# Altium PCB Battery chargers.PcbDoc
Units mm, origin at the board's own origin, x right, y up, seen from the top; angles counter-clockwise.
Board outline 35 x 24 mm, 2 copper layers (Top Layer, Bottom Layer); 33 components, 19 nets, 97 pads, 8 vias.
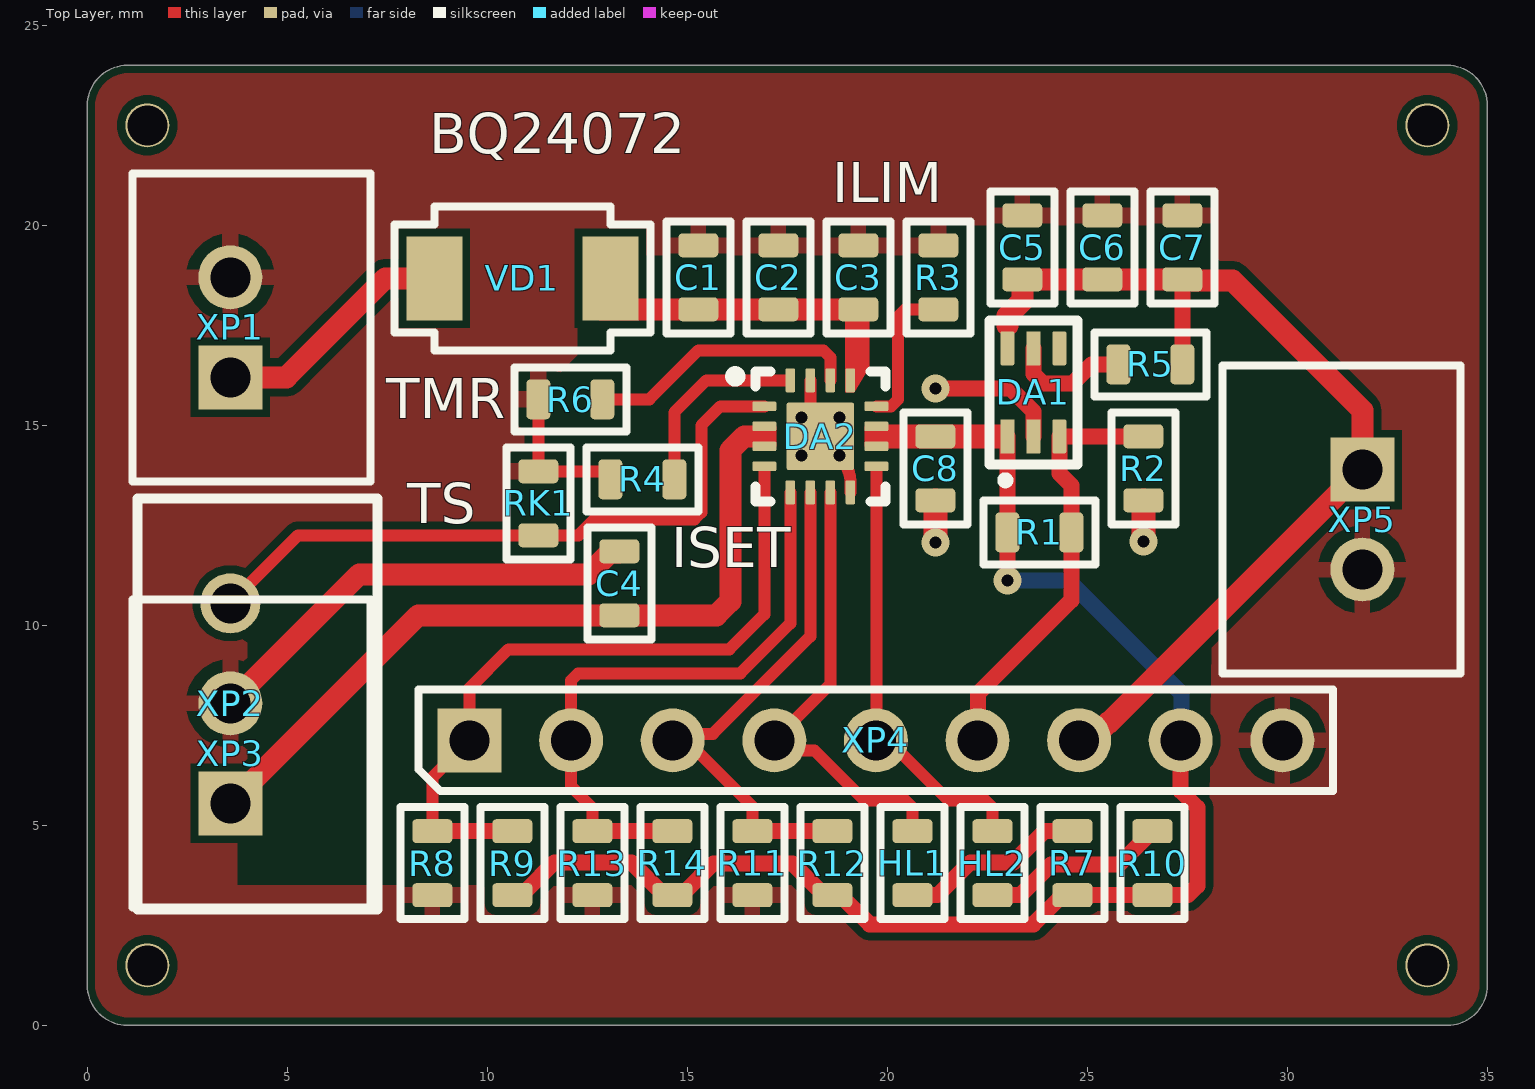
[diagram p0: Top Layer view]
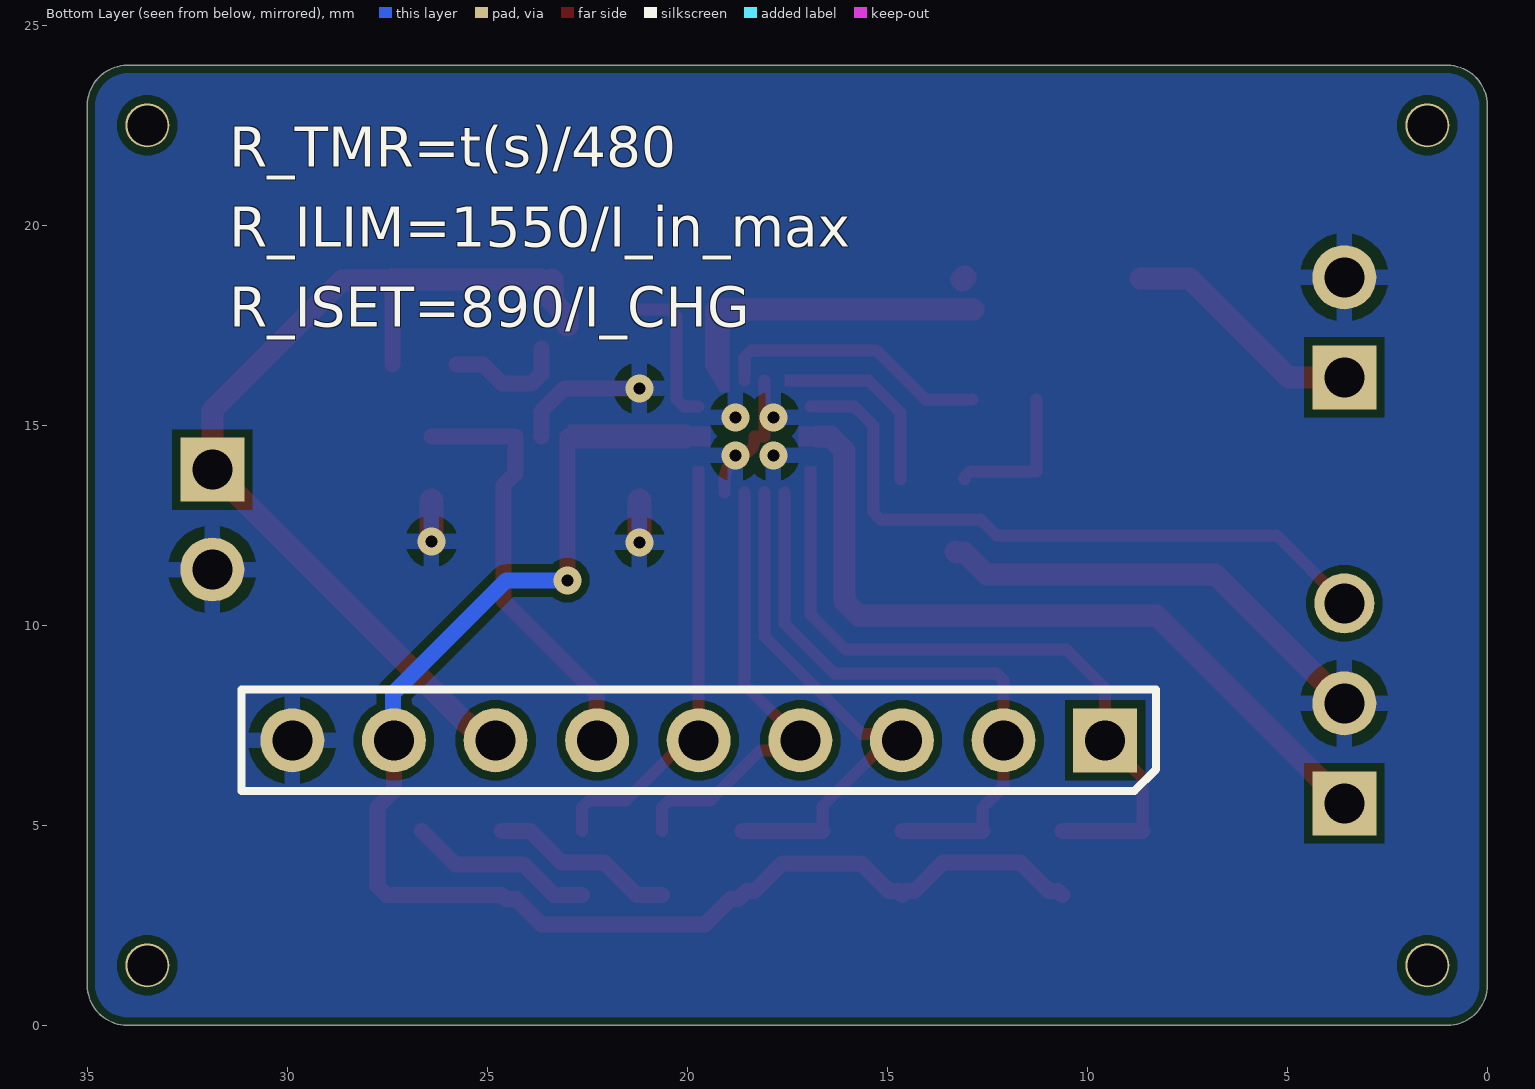
[diagram p1: Bottom Layer view, seen from below]

## Layer stack, top to bottom
Top Solder: solder mask 0.0102, Solder Resist, Dk 3.5
Top Layer: signal copper 0.0356
Dielectric 1: dielectric 0.32, FR-4, Dk 4.8
Bottom Layer: signal copper 0.0356
Bottom Solder: solder mask 0.0102, Solder Resist, Dk 3.5

## Board outline
0,1 0,23 cw(c1,23) 1,24 34,24 cw(c34,23) 35,23 35,1 cw(c34,1) 34,0 1,0 cw(c1,1)

## Design rules (kind name [scope] priority, off if disabled: settings)
AcuteAngle [All] p1: minimum=4.50000000000000E+0001 checktracksonly=FALSE
BoardOutlineClearance BoardOutlineClearance_mid [OnMid or OnPlane] p1: gap=0.5 ignorepadtopadclearanceinfootprint=FALSE
BoardOutlineClearance BoardOutlineClearance_top [OnCopper] p2: gap=0.2 ignorepadtopadclearanceinfootprint=FALSE
Clearance [All] p1: gap=0.15 ignorepadtopadclearanceinfootprint=FALSE except(0: Arc-Hole Track-Hole SMDPad-Hole THPad-Hole Via-Hole Fill-Hole Poly-Hole Region-Hole Text-Hole; 0.2: Arc-Poly Arc-Region Track-Poly Track-Region SMDPad-Poly SMDPad-Region THPad-Poly THPad-Region Via-Poly Via-Region Fill-Poly Fill-Region Poly-Poly Poly-Region Poly-Text Region-Region Region-Text)
ComponentClearance [All] p1: gap=0.2 collisioncheckmode=3 verticalgap=0.2 showdistances=FALSE
DiffPairsRouting [All] p1: maxlimit=0.3 minlimit=0.15 mostfreqgap=0.15 toplayer_minwidth=0.15 toplayer_maxwidth=0.3 toplayer_prefwidth=0.15 bottomlayer_minwidth=0.15 bottomlayer_maxwidth=0.3 bottomlayer_prefwidth=0.15 maxuncoupledlength=12.7
Height [All] p1: minheight=0 maxheight=50 prefheight=10
HoleSize HoleSize_pad [IsPad] p1: absolutevalues=TRUE maxlimit=6 minlimit=0.6 maxpercent=80.000 minpercent=20.000
HoleSize HoleSize_via [IsVia] p2: absolutevalues=TRUE maxlimit=1 minlimit=0.3 maxpercent=80.000 minpercent=20.000
HoleToHoleClearance [All] p1: gap=0.4 allowstackedmicrovias=TRUE
MinimumAnnularRing [All] p1: minimumring=0.2
PasteMaskExpansion [All] p1: expansion=-0.05
PlaneClearance [All] p1: clearance=0.4
PlaneConnect [All] p1: planeconnectstyle=Direct reliefexpansion=0.508 reliefentries=4 reliefconductorwidth=0.254 reliefairgap=0.254
PolygonConnect [All] p1: connectstyle=Relief reliefconductorwidth=0.4 reliefentries=4 polygonreliefangle="90 Angle" airgapwidth=0.3
RoutingCorners [All] p1: cornerstyle=45-Degree minsetback=2 maxsetback=2
RoutingVias [All] p1: holewidth=0.3 width=0.7 viastyle="Through Hole" minholewidth=0.3 minwidth=0.7 maxholewidth=1 maxwidth=1.5
SMDEntry [All] p1: side=TRUE corner=TRUE anyangle=FALSE
SilkToSilkClearance [All] p1: silktosilkclearance=0
SilkToSolderMaskClearance [IsPad] p1: minsilkscreentomaskgap=0 clearancetoexposedcopper=TRUE
SolderMaskExpansion [All] p1: expansion=0.075 istentingtop=FALSE
Width [All] p1: maxlimit=3 minlimit=0.15 preferedwidth=0.2
19 further rules are at their usual default settings.

## Components (designator, comment, footprint, x,y, rotation, side; value= is the part's Value field where it differs from the comment)
C1 "GRM188R61C106MA73" C_0603_Manual_mount 15.274,18.7 r90 top value="10 мк"
C2 "GRM188R61C225KE15" C_0603_Manual_mount 17.275,18.7 r90 top value="2,2 мк"
C3 "CC0603KRX7R7BB104" C_0603_Manual_mount 19.275,18.7 r90 top value="0,1 мк"
C4 "GRM188R61C106MA73" C_0603_Manual_mount 13.3,11.049 r90 top value="10 мк"
C5 "GRM188R61C106MA73" C_0603_Manual_mount 23.376,19.45 r90 top value="10 мк"
C6 "GRM188R61C225KE15" C_0603_Manual_mount 25.376,19.45 r90 top value="2,2 мк"
C7 "CC0603KRX7R7BB104" C_0603_Manual_mount 27.376,19.45 r90 top value="0,1 мк"
C8 "GRM188R61C106MA73" C_0603_Manual_mount 21.2,13.925 r270 top value="10 мк"
DA1 "TPS22919DCKT" SC70 23.65,15.825 r90 top
DA2 "BQ24072RGTR" VQFN-16 18.325,14.725 r0 top
HL1 "KP-1608MGC" LED_0603_Green_Manual_mount 20.627,4.055 r270 top
HL2 "KP-1608SURC" LED_0603_Red_Manual_mount 22.627,4.055 r270 top
R1 "RC0603JR-0710KL" R_0603_Manual_mount 23.801,12.325 r180 top value="10 к"
R2 "RC0603JR-0710KL" R_0603_Manual_mount 26.401,13.925 r90 top value="10 к"
R3 "RC0603JR-071K1L" R_0603_Manual_mount 21.275,18.7 r270 top value="1,1 к"
R4 "RC0603JR-07910RL" R_0603_Manual_mount 13.875,13.65 r0 top value=910
R5 "RC0603JR-071KL" R_0603_Manual_mount 26.575,16.525 r0 top value="1 к"
R6 "RC0603JR-0747KL" R_0603_Manual_mount 12.075,15.65 r0 top value="47 к"
R7 "RC0603JR-071K5L" R_0603_Manual_mount 24.627,4.055 r270 top value="1,5 к"
R8 "RC0603JR-0710KL" R_0603_Manual_mount 8.625,4.055 r90 top value="10 к"
R9 "RC0603JR-0710KL" R_0603_Manual_mount 10.626,4.055 r270 top value="10 к"
R10 "RC0603JR-071K5L" R_0603_Manual_mount 26.628,4.055 r270 top value="1,5 к"
R11 "RC0603JR-0710KL" R_0603_Manual_mount 16.626,4.055 r90 top value="10 к"
R12 "RC0603JR-0710KL" R_0603_Manual_mount 18.627,4.055 r270 top value="10 к"
R13 "RC0603JR-0710KL" R_0603_Manual_mount 12.626,4.055 r90 top value="10 к"
R14 "RC0603JR-0710KL" R_0603_Manual_mount 14.626,4.055 r270 top value="10 к"
RK1 "NTHS0603N02N1002J" RK_0603_Manual_Mount 11.275,13.05 r270 top value="10 к"
VD1 "PMEG4030EP" SOD-128 10.874,18.675 r180 top
XP1 "DS1069-2MVW6X" DS1069-2MVxxX 3.575,17.45 r90 top
XP2 "DS1069-3MVW6X" DS1069-3MVW6X 3.575,8.05 r90 top
XP3 "DS1069-2MVW6X" DS1069-2MVxxX 3.575,6.8 r90 top
XP4 "PLS-9" PLS-9 19.715,7.125 r0 top
XP5 "DS1069-2MVW6X" DS1069-2MVxxX 31.876,12.645 r270 top

## Footprints (in the part's own frame and the unit in brackets; to place one, negate y for a bottom-side part, rotate by r counter-clockwise, add the part's x,y. Pads: shape width x height; smd on the part's side, far side on the other; paste and mask are expansions set on the pad)
C_0603_Manual_mount [mm] "SMD 0603"
  rrect35% 0.6x1 smd: 1(-0.8,0) 2(0.8,0)
  silkscreen extent -1.4,-0.8 1.4,0.8, body extent -0.8,-0.43 0.8,0.43, height 0.9
DS1069-2MVxxX [mm] "2.5mm-step power connector"
  rect 1.6x1.6 hole 1: 1(-1.25,0)
  round 1.6 hole 1: 2(1.25,0)
  silkscreen extent -3.85,-3.5 3.85,2.45, body extent -3.75,-3.55 3.75,2.2, height 7
DS1069-3MVW6X [mm]
  rect 1.5x1.5 hole 1: 1(-2.5,0)
  round 1.5 hole 1: 2(0,0) 3(2.5,0)
  silkscreen extent -5.15,-3.67 5.13,2.32, body extent -5,-3.55 5,2.2, height 7
LED_0603_Green_Manual_mount [mm] "SMD 0603"
  rrect35% 0.6x1 smd: A(0.8,0) C(-0.8,0)
  silkscreen extent -1.4,-0.8 1.4,0.8, body extent -0.8,-0.43 0.8,0.43, height 0.45
LED_0603_Red_Manual_mount [mm] "SMD 0603"
  rrect35% 0.6x1 smd: A(0.8,0) C(-0.8,0)
  silkscreen extent -1.4,-0.8 1.4,0.8, body extent -0.8,-0.43 0.8,0.43, height 0.45
PLS-9 [mm] "2.54mm-step 9-pin connector"
  rect 1.6x1.6 hole 1: 1(-10.16,0)
  round 1.6 hole 1: 2(-7.62,0) 3(-5.08,0) 4(-2.54,0) 5(0,0) 6(2.54,0) 7(5.08,0) 8(7.62,0) 9(10.16,0)
  silkscreen extent -11.43,-1.27 11.43,1.27, body extent -11.43,-1.25 11.43,1.25, height 8.5
R_0603_Manual_mount [mm] "SMD 0603"
  rrect35% 0.6x1 smd: 1(-0.8,0) 2(0.8,0)
  silkscreen extent -1.4,-0.8 1.4,0.8, body extent -0.8,-0.43 0.8,0.43, height 0.45
RK_0603_Manual_Mount [mm] "SMD 0603"
  rrect35% 0.6x1 smd: 1(-0.8,0) 2(0.8,0)
  silkscreen extent -1.4,-0.8 1.4,0.8, body extent -0.8,-0.43 0.8,0.43, height 0.9
SC70 [mm]
  rrect5% 0.85x0.35 smd: 1(-1.1,0.65) 2(-1.1,0) 5(1.1,0)
  rrect25% 0.85x0.35 smd: 3(-1.1,-0.65) 4(1.1,-0.65) 6(1.1,0.65)
  silkscreen extent -2.3,-1.1 1.8,1.1, body extent -1.05,-1 1.05,1, height 1.1
SOD-128 [mm] "Small and flat lead  Surface-Mounted Device (SMD) plastic package"
  rect 1.4x2.1 smd paste-0.1: A(2.2,0) C(-2.2,0)
  silkscreen extent -3.2,-1.8 3.2,1.8, body extent -2.4,-1.25 2.4,1.25, height 1
VQFN-16 [mm]
  rrect30% 0.6x0.24 smd: 1(-1.4,0.75) 2(-1.4,0.25) 3(-1.4,-0.25) 4(-1.4,-0.75) 9(1.4,-0.75) 10(1.4,-0.25) 11(1.4,0.25) 12(1.4,0.75)
  rrect30% 0.24x0.6 smd: 5(-0.75,-1.4) 6(-0.25,-1.4) 7(0.25,-1.4) 8(0.75,-1.4) 13(0.75,1.4) 14(0.25,1.4) 15(-0.25,1.4) 16(-0.75,1.4)
  rrect5% 1.68x1.68 smd: 17(0,0)
  silkscreen extent -2.25,-1.63 1.63,1.63, body extent -1.51,-1.53 1.59,1.57, height 1

## Part data
C1 C4 C5 C8: "Chip Monolithic Ceramic Capacitor", Manufacturer="Murata Manufacturing", Rated voltage="16 В", Temperature coefficient="±15 %", Temperature range="-55 ... 85 °C", Tolerance="20 %", Part Number=GRM188R61C106MA73, Size=0603, TC=X5R, Type="Конденсатор керамический"
C2 C6: "Chip Monolithic Ceramic Capacitor", Manufacturer="Murata Manufacturing", Rated voltage="16 В", Temperature coefficient="±15 %", Temperature range="-55 ... 85 °C", Tolerance="10 %", Part Number=GRM188R61C225KE15, Size=0603, TC=X5R, Type="Конденсатор керамический"
C3 C7: "Surface-mount Ceramic Multilayer Capacitor", Manufacturer=YAGEO, Rated voltage="16 В", Temperature coefficient="±15 %", Temperature range="-55 ... 125 °C", Tolerance="10 %", Part Number=CC0603KRX7R7BB104, Size=0603, TC=X7R, Type="Конденсатор керамический"
DA1: "5.5 V, 1.5 A, 90-mΩ Self-Protected Load Switch with Controlled Rise Time", Current limit="1,5 А", Manufacturer="Texas Instruments", Operating voltage="1,6 ... 5,5  В", Temperature range="-40 ... 125 C", Rds="89 ... 105 мОм", Type="Силовой электронный ключ"
DA2: "Standalone 1-Cell 1.5-A Linear Battery Chargers with Power Path", Charge current="0,1 ... 1,5 А", Input voltage="4,35 ... 6,6 В", Manufacturer="Texas Instruments", Output voltage="4.2 В", Temperature range="-40 ... 125  °C", Voltage accuracy=±1%, Battery type=Li-Ion/Li-Poly, Number of cells=1, Standard="Fast Charge", Type="Контроллер АКБ"
HL1: "SMD LED", Color=Зеленый, Forward voltage="2,1 В", Manufacturer=Kingbright, Max. forward current="30 мА", Max. reverse voltage="5 В", Power dissitipation="75 мВт", Temperature range="-40 ... 85 °C", Size=0603, Type=Светодиод
HL2: "SMD LED", Color=Красный, Forward voltage="1,9 В", Manufacturer=Kingbright, Max. forward current="30 мА", Max. reverse voltage="5 В", Power dissitipation="170 мВт", Temperature range="-40 ... 85 °C", Size=0603, Type=Светодиод
R1 R2 R3 R4 R5 R6 R7 R8 R9 R10 R11 R12 R13 R14: "General Purpose Chip Resistor", Manufacturer=YAGEO, Power dissipation="0,1 Вт", Temperature coefficient="±100 ppm/°C", Temperature range="-55 ... 155 °C", Tolerance="5 %", Size=0603, Type="Резистор постоянный"
  R1 R2 R8 R9 R11 R12 R13 R14: Part Number=RC0603JR-0710KL
  R3: Part Number=RC0603JR-071K1L
  R4: Part Number=RC0603JR-07910RL
  R5: Part Number=RC0603JR-071KL
  R6: Part Number=RC0603JR-0747KL
  R7 R10: Part Number=RC0603JR-071K5L
RK1: "NTC Thermistor", B tolerance=3%, Manufacturer=Vishay, Power dissipation="0,1 Вт", Temperature range="-40 ... 125 °C", Tolerance="5 %", B(25-75 °C)="3477 К", B(25-85 °C)="3486 К", Part Number=NTHS0603N02N1002J, Size=0603, Type=Термистор
VD1: "3 A low VF MEGA Schottky barrier rectifier", Forward voltage="0,49 В", Manufacturer=NXP, Max average forward current="3 А", Max non-repetitive peak forward current="50 А", Max reverse voltage="40 В", Temperature range="-55 ... 150 °C", Type="Диод Шоттки"
XP1 XP2 XP3 XP5: "2.5mm-step power connector", Manufacturer=CONNFLY, Connector type="Вилка на плату", Type="Разъем штыревой"
  XP1 XP3 XP5: Number of contacts=2
  XP2: Number of contacts=3
XP4: "PLS connector", Manufacturer=NONAME, Connector type="Вилка на плату", Number of contacts=9, Type="Разъем штыревой"

## Free pads (board coordinates)
  round 1.1 hole 1: *6(1.5,22.5) *7(1.5,1.5) *8(33.5,1.5) *9(33.5,22.5)

## Via types
v1: diameter 0.7, hole 0.3, Top Layer to Bottom Layer, 8 vias

## Nets (pads, with @x,y where several pads share a name; then routed paths per layer and width w, separated by ;. In a path a pad name is that pad's centre, name@x,y a point inside that pad or via, vN(x,y) a via of type N, cw(c..) or ccw(c..) an arc to the next point about the centre after c; other vN are vias at no path point)
CE: DA2.4 R8.2 R9.1 XP4.1 | length 17.4
  Top Layer w0.3: R8.2 8.625,6.195 XP4.1 9.555,8.43 10.525,9.4 16.05,9.4 16.925,10.275 16.925,13.575
  Top Layer w0.4: R8.2 9.125,4.855 R9.1
CHG: DA2.9 HL2.C XP4.5 | length 10.8
  Top Layer w0.3: XP4.5 XP4.5@19.725,7.125 ; 19.725,13.725 XP4.5@19.725,7.125 ; HL2.C 22.627,5.447 22.451,5.623 21.527,5.623 20.025,7.125 XP4.5@19.725,7.125
EN1: DA2.6 R11.2 R12.1 XP4.3 | length 13.4
  Top Layer w0.3: R11.2 16.626,5.474 14.975,7.125 XP4.3 14.799,7.289 15.639,7.289 18.075,9.725 DA2.6
  Top Layer w0.4: R11.2 18.127,4.855 R12.1
EN2: DA2.5 R13.2 R14.1 XP4.2 | length 15.3
  Top Layer w0.3: R13.2 12.626,5.438 12.095,5.969 12.095,8.624 12.271,8.8 16.325,8.8 17.575,10.05 DA2.5
  Top Layer w0.4: R13.2 14.126,4.855 R14.1
GND: C1.2 C2.2 C3.2 C4.2 C5.2 C6.2 C7.2 C8.2 DA1.2 DA2.8 DA2.15 DA2.17 R2.1 R3.1 R4.1 R6.1 R8.1 R11.1 R13.1 RK1.1 XP1.2 XP2.2 XP3.2 XP4.9 XP5.2 | length 23.8
  Top Layer w0.3: R6.1 11.275,15.15 RK1.1 12.925,13.85 13.075,13.7 R4.1 ; DA2.15 18.075,14.725 DA2.17 18.325,14.604 ccw(c18.625,14.606) 18.538,14.319 cw(c18.325,13.6) 19.075,13.6 DA2.8
  Top Layer w0.4: v1(21.2,15.925) 23.075,15.925 23.65,15.35 DA1.2
  Top Layer w0.55: XP2.2 6.8,11.275 12.526,11.275 13.075,11.824 13.275,11.824 C4.2
  Top Layer w0.6: v1(21.2,12.075) C8.2 ; v1(26.4,12.1) R2.1@26.4,13.125
  other v1: 17.85,14.25 18.8,14.25 17.85,15.2 18.8,15.2
NetC1_1: C1.1 C2.1 C3.1 DA2.13 VD1.C | length 6.5
  Top Layer w0.55: VD1.C@12.85,17.9 C1.1 C2.1 C3.1
  Top Layer w0.6: VD1.C@13.074,18.7 VD1.C@13.124,18.65
NetC4_1: C4.1 DA2.2 DA2.3 XP2.1 XP3.1 | length 19.2
  Top Layer w0.55: XP2.1 8.275,10.249 14.475,10.249 15.724,10.249 16.075,10.601 16.075,14.374 16.426,14.725 16.75,14.725
NetDA1_5: DA1.5 R5.1 | length 3.1
  Top Layer w0.4: DA1.5 23.65,16.284 23.884,16.05 24.634,16.05 25.109,16.525 R5.1
NetDA2_1: DA2.1 RK1.2 XP2.3 | length 16.7
  Top Layer w0.3: XP2.3@3.575,10.559 5.266,12.25 RK1.2 12.275,12.25 12.675,12.65 15.174,12.65 15.35,12.826 15.35,15 15.825,15.475 DA2.1
NetDA2_12: DA2.12 R3.2 | length 3.8
  Top Layer w0.3: DA2.12 20.097,15.475 20.272,15.651 20.272,17.724 20.448,17.9 R3.2
NetDA2_14: DA2.14 R6.2 | length 6.9
  Top Layer w0.3: R6.2 14.05,15.65 15.275,16.875 18.399,16.875 18.575,16.699 DA2.14
NetDA2_16: DA2.16 R4.2 | length 4.6
  Top Layer w0.3: R4.2 14.675,15.325 15.475,16.125 17.275,16.125
NetHL1_A: HL1.A R7.1 | length 4.7
  Top Layer w0.4: HL1.A 21.255,3.255 22.075,4.075 23.15,4.075 23.93,4.855 R7.1
NetHL2_A: HL2.A R10.1 | length 4.7
  Top Layer w0.4: HL2.A 23.328,3.255 24.098,4.025 25.798,4.025 R10.1
NetVD1_A: VD1.A XP1.1 | length 5.9
  Top Layer w0.55: XP1.1@3.774,16.2 4.975,16.2 7.45,18.675 VD1.A
ON: DA1.3 R1.1 R2.2 XP4.6 | length 10.8
  Top Layer w0.4: XP4.6 22.266,7.136 22.266,8.291 24.601,10.626 R1.1 24.601,13.501 24.3,13.801 DA1.3 R2.2
OUT+: C5.1 C6.1 C7.1 DA1.6 R5.2 XP4.7 XP5.1 | length 24.4
  Top Layer w0.4: R5.2 R5.2@27.375,17.025 ; 27.376,17.026 C7.1
  Top Layer w0.55: 23,17.5 23,17.73 23.376,18.106 C5.1 ; C5.1@23.648,18.65 C6.1 C7.1 27.401,18.625 28.625,18.625 31.876,15.374 XP5.1 25.549,7.569 25.523,7.569 25.079,7.125 XP4.7
PG: DA2.7 HL1.C XP4.4 | length 11.5
  Top Layer w0.3: DA2.7 18.575,8.525 XP4.4 17.424,6.876 18.174,6.876 19.425,5.625 20.451,5.625 20.627,5.449 HL1.C
SWITCH: C8.1 DA1.1 DA2.10 DA2.11 R1.2 R7.2 R9.2 R10.2 R12.2 R14.2 XP4.8 | length 34.4
  Top Layer w0.4: R9.2 10.726,3.355 10.955,3.355 11.675,4.075 13.6,4.075 14.32,3.355 14.526,3.355 R14.2 14.726,3.355 14.955,3.355 15.65,4.05 17.625,4.05 18.32,3.355 18.527,3.355 18.727,3.155 18.927,3.155 19.556,2.525 23.65,2.525 24.28,3.155 24.527,3.155 R7.2 R10.2 27.516,3.255 27.75,3.489 27.75,5.446 27.335,5.861 XP4.8 ; v1(23,11.125) 23,12.324 23.001,12.825 DA1.1
  Top Layer w0.6: C8.1 22.275,14.725
  Bottom Layer w0.4: v1(23,11.125) 24.525,11.125 27.359,8.291 27.359,7.149 XP4.8
pads on no net: DA1.4

## Polygon pours and split planes (outlines as drawn)
GND on Bottom Layer "GND_L02_P000" (solid, remove dead copper, pour order 0): 0,24 35,24 35,0 0,0
GND on Top Layer "GND_L01_P032" (solid, remove dead copper, pour order 32): 28,0 35,0 35,20.75 28.979,20.75 28.229,20
GND on Top Layer "GND_L01_P023" (solid, remove dead copper, pour order 23): 0,6.75 3.75,6.75 3.75,3.5 28.25,3.5 28.25,0 0,0
GND on Top Layer "GND_L01_P017" (solid, remove dead copper, pour order 17): 10.468,14.05 10.468,12.282 10.5,12.25 5.25,12.25 4,11 4,6.5 0,6.5 0,14
GND on Top Layer "GND_L01_P011" (solid, remove dead copper, pour order 11): 11.25,16.5 11.25,13.5 0,13.5 0,16.5
GND on Top Layer "GND_L01_P010" (solid, remove dead copper, pour order 10): 12.174,19.925 12.25,19.849 12.25,16.75 11.5,16 0,16 0,20
GND on Top Layer "GND_L01_P005" (solid, remove dead copper, pour order 5): 0,24 35,24 35,20 22,20 22,19.25 0,19.25

## Other copper
Top Layer:
  rectangle net SWITCH: 19.425,14.475 20,14.975
  rectangle net SWITCH: 22.125,14.425 23,15.025
  region net SWITCH: 21.2,14.425 21.2,15.025 19.95,15.025 19.95,14.425
  rectangle net NetDA2_16: 17.1,15.975 17.575,16.275
  rectangle net NetC4_1: 16.45,14.475 17.225,14.975
  rectangle net CE: 16.775,13.35 17.075,13.975
  rectangle net CHG: 19.575,13.5 19.875,13.975
  region net NetC1_1: 19.55,17.914 19.55,16.45 19.175,15.825 18.95,15.825 18.95,17.914

## Silkscreen, mask and mechanical layers (free items; w line width, h text height)
Top Overlay:
  text "BQ24072" at 8.55,21.8 h1
  text "ILIM" at 18.625,20.575 h1
  text "TMR" at 7.475,15.175 h1
  text "TS" at 8,12.55 h1
  text "ISET" at 14.6,11.45 h1
Bottom Overlay:
  text "R_TMR=t(s)/480" at 31.45,21.467 h1
  text "R_ILIM=1550/I_in_max" at 31.45,19.467 h1
  text "R_ISET=890/I_CHG" at 31.45,17.467 h1
Mechanical 2:
  the board outline again, w0.25